# EAGLE board PCB_-_Final_Revision_v12 (EAGLE 9.7.0)
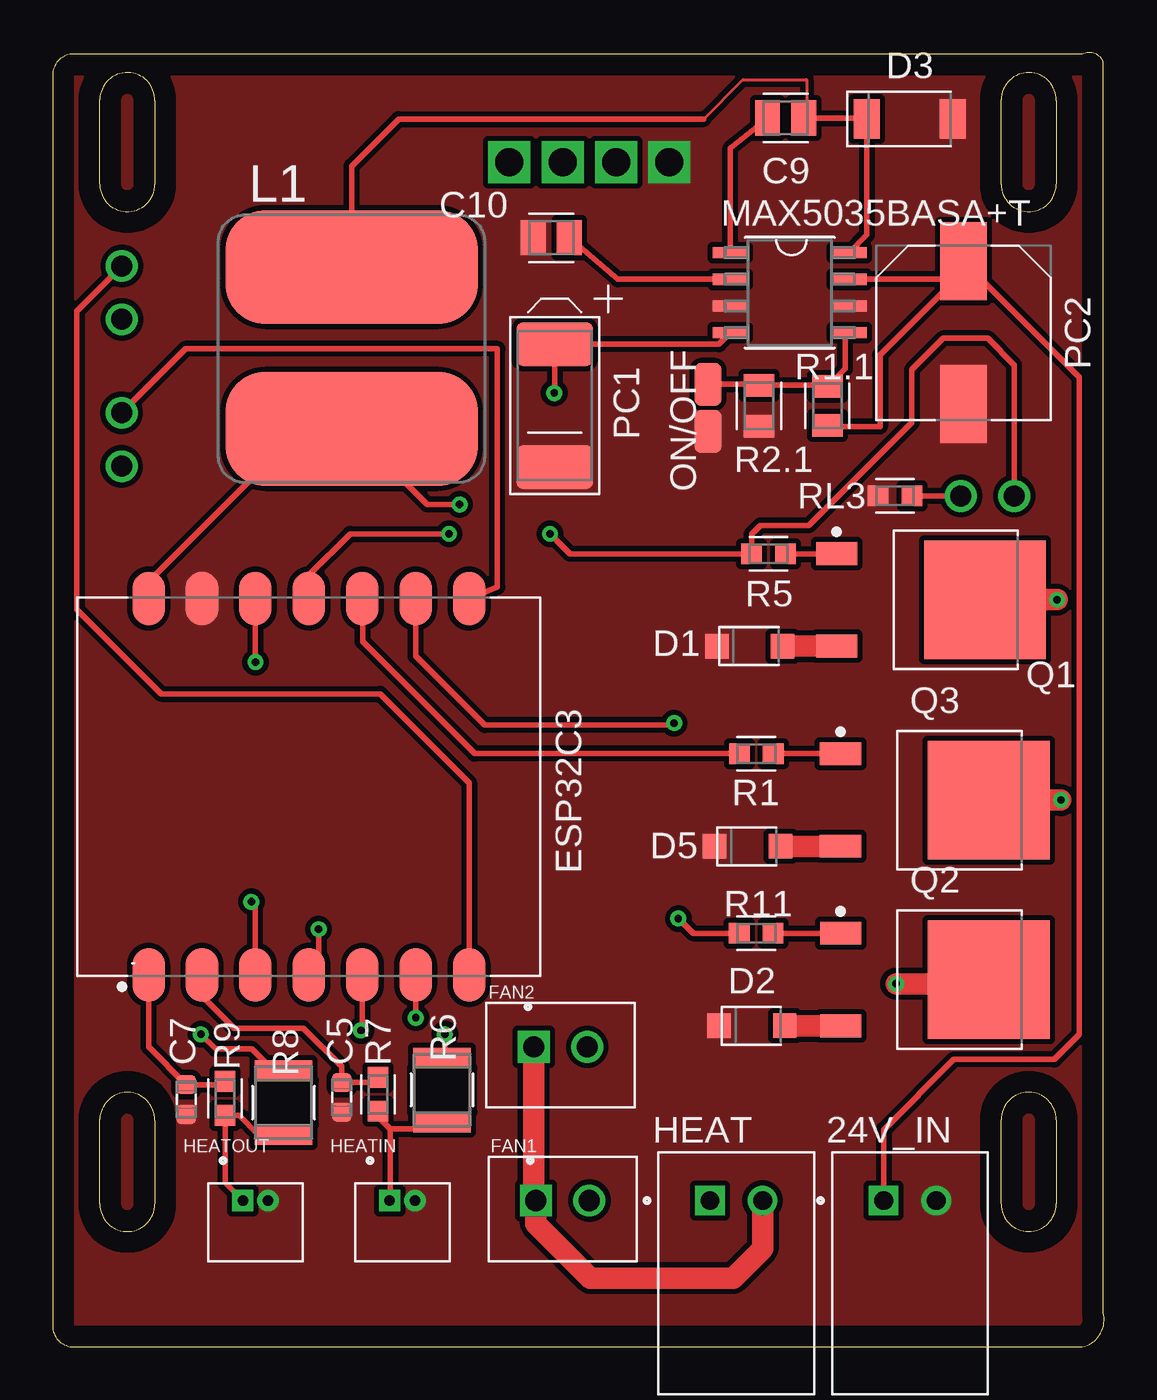
[diagram p0: board, top side]
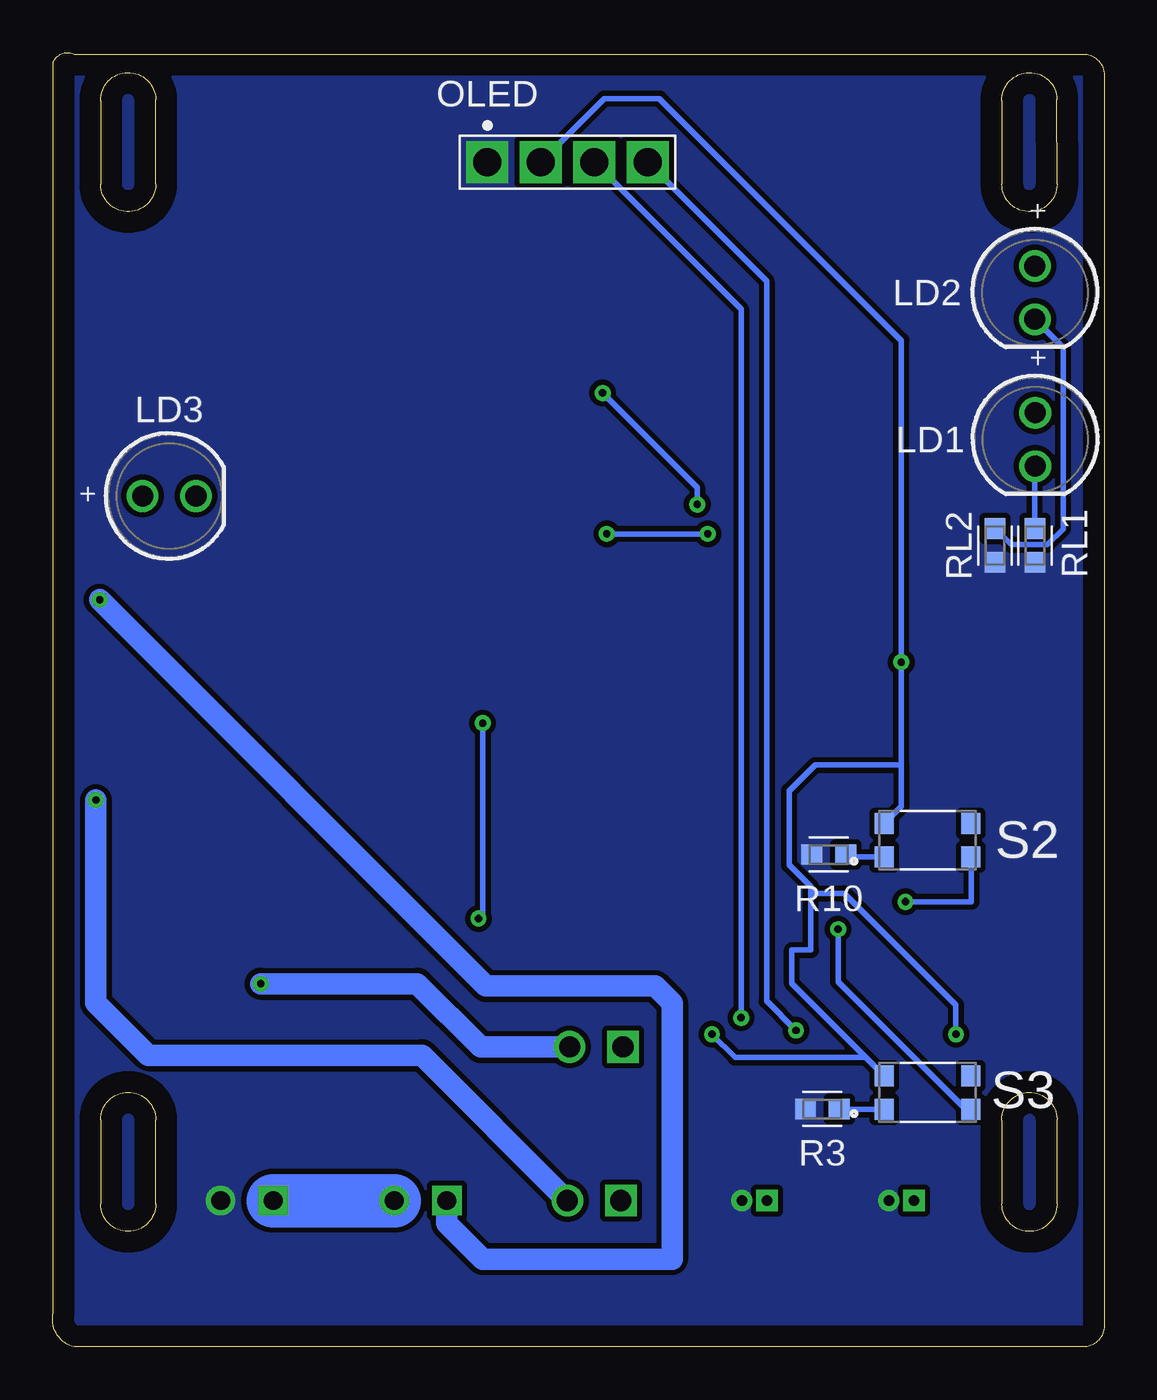
[diagram p1: board, bottom side, seen from below]

Size 50 x 61.56 mm. Coordinates in mm from the lower left corner, seen from the top.
Outline: 4.87,55.3 4.87,59.28 arc180 2.25,59.32 2.25,59.28 2.25,55.3 arc180 4.87,55.3
Outline: 4.87,55.3 4.87,55.3
Outline: 47.72,55.3 47.72,59.28 arc180 45.1,59.32 45.1,59.28 45.1,55.3 arc180 47.72,55.3
Outline: 47.72,55.3 47.72,55.3
Outline: 45.1,6.8 45.1,10.8 arc-180 47.72,10.8 47.72,6.8 arc-180 45.1,6.8
Outline: 2.25,6.8 2.25,10.78 2.25,10.81 arc-180 4.87,10.78 4.87,6.8 arc-180 2.25,6.8
Outline: 0,60.49 0,1 arc90 1,0 48.96,0 arc90 49.96,1.64 49.96,61.12 arc90 48.96,61.49 1,61.49 arc90 0,60.49
Copper layers (1*16): Top 0.035mm / dielectric 1.5mm / Bottom 0.035mm
Design rules "default": minimum track width 6mil, minimum drill 0.35mm, track to track 6mil, track to pad 6mil, pad to pad 6mil, via to via 6mil, smd to smd 6mil, copper to edge 40mil, drill to drill 6mil, minimum pad ring 10mil, minimum via ring 8mil, stop-mask expansion 4mil, vias tented up to drill 0mil, thermal gap 10mil

## Footprints (pad centres in the part's own frame; a part is rotated, then mirrored left to right if it is on the bottom)
HDR-02/RA = drill 0.9 square: 1 -1.25,0 | drill 0.9: 2 1.25,0
CAP_0603 = smd 0.92 x 0.93: 1 -0.705,0; 2 0.705,0
CAPACITOR_M = smd 1.187 x 1.677: 1 -0.865,0; 2 0.865,0
SCHOTTKY_DIODE_S = smd 1.117 x 1.167: NEG -1.56,0; POS 1.56,0
PANJIT_SB52AFC~SB56AFC_SERIES_DIODE = smd 1.236 x 1.881: NEG -2.04,0; POS 2.04,0
XIIO_ESP32C3_ALT = smd 2.54 x 1.537: 1 -8.95,7.62; 2 -8.95,5.08; 3 -8.95,2.54; 4 -8.95,0; 5 -8.95,-2.54; 6 -8.95,-5.08; 7 -8.95,-7.62; 8 8.95,-7.62; 9 8.95,-5.08; 10 8.95,-2.54; 11 8.95,0; 12 8.95,2.54; 13 8.95,5.08; 14 8.95,7.62
SMALL_CONNECT2.54 = drill 1: NEG 1.27,0 | drill 1 square: POS -1.27,0
SMALL_CONNECT = drill 0.5: NEG 0.6,0 | drill 0.5 square: POS -0.6,0
100UH_INDUCTOR = smd 5.4 x 12: P$1 0,0; P$2 7.7,0
WL-TMRC_5MM = drill 1: 1 -1.27,0; 2 1.27,0
I2C_OLED = drill 1.331 pad 1.997 square: 1 0,0; 2 2.54,0; 3 5.08,0; 4 7.62,0
SOLDER_JUMPER = smd 2.032 x 1.27: P$1 0.3,0; P$2 2.54,0
TANTALUM_CAPACITOR_68UF = smd 2.067 x 3.617: + -2.925,0; - 2.925,0
68UF_CAPAE830X1000N = smd 3.717 x 2.217: NEG 3.4,0; POS -3.4,0
NFET = smd 5.797 x 5.637: D 2.565,0 | smd 1.957 x 1.077: G -4.485,2.2; S -4.485,-2.2
RESISTOR_S = smd 0.987 x 0.97: 1 -0.806,0; 2 0.806,0
1MOHM_RESISTOR_SMD = smd 1.067 x 1.467: 1 -0.925,0; 2 0.925,0
383KOHM_RESISTOR_0805 = smd 1.067 x 1.467: 1 -0.975,0; 2 0.975,0
RES_RN73R2E_KOA-M = smd 0.914 x 2.743: 1 -1.549,0; 2 1.549,0
SW_TL6330AF200Q = smd 0.9 x 1: 1 -2.05,-0.8; 2 2.05,-0.8; 3 -2.05,0.8; 4 2.05,0.8
21-0041B_8_MXM-M = smd 1.664 x 0.533: 1 -2.826,1.905; 2 -2.826,0.635; 3 -2.826,-0.635; 4 -2.826,-1.905; 5 2.826,-1.905; 6 2.826,-0.635; 7 2.826,0.635; 8 2.826,1.905

## Placement (x,y rotation side)
24V_IN  S2B-XH-A(LF)(SN)  [HDR-02/RA]  40.76,6.96 0 top
C5  C0603C100C5GACTU  [CAP_0603]  13.74,11.87 90 top
C7  C0603C100C5GACTU  [CAP_0603]  6.36,11.77 90 top
C9  CAPACITOR_S  [CAPACITOR_M]  34.85,58.45 180 top
C10  CAPACITOR_S  [CAPACITOR_M]  23.71,52.75 0 top
D1  ES1D  [SCHOTTKY_DIODE_S]  33.14,33.33 0 top
D2  ES1D  [SCHOTTKY_DIODE_S]  33.25,15.27 0 top
D3  MBR0520LT1G  [PANJIT_SB52AFC~SB56AFC_SERIES_DIODE]  40.76,58.4 0 top
D5  ES1D  [SCHOTTKY_DIODE_S]  33.04,23.81 0 top
ESP32C3  XIAO_ESP32C3_ALT  [XIIO_ESP32C3_ALT]  12.18,26.65 90 top
FAN1  SMALL_CONNECTOR_2.54  [SMALL_CONNECT2.54]  24.25,6.96 0 top
FAN2  SMALL_CONNECTOR_2.54  [SMALL_CONNECT2.54]  24.15,14.27 0 top
HEAT  S2B-XH-A(LF)(SN)  [HDR-02/RA]  32.5,6.96 0 top
HEATIN  SMALL_CONNECT  [SMALL_CONNECT]  16.63,6.96 0 top
HEATOUT  SMALL_CONNECT  [SMALL_CONNECT]  9.64,6.96 0 top
L1  INDUCTOR_100  [100UH_INDUCTOR]  14.21,43.66 90 top
LD1  151051BS04000  [WL-TMRC_5MM]  3.28,43.16 270 bottom
LD2  151051BS04000  [WL-TMRC_5MM]  3.29,50.14 270 bottom
LD3  151051BS04000  [WL-TMRC_5MM]  44.45,40.47 0 bottom
OLED  I2C_OLED  [I2C_OLED]  29.33,56.34 0 bottom
ON/OFF  SOLDER_JUMPER  [SOLDER_JUMPER]  31.16,46.08 270 top
PC1  POLORIZED_100UF  [TANTALUM_CAPACITOR_68UF]  23.87,44.77 270 top
PC2  68UF_POLORIZED_CAP  [68UF_CAPAE830X1000N]  43.3,48.24 270 top
Q1  NFET  [NFET]  41.76,35.54 0 top
Q2  NFET  [NFET]  41.95,17.47 0 top
Q3  NFET  [NFET]  41.95,26.01 0 top
R1  RESISTOR_S  [RESISTOR_S]  33.46,28.22 180 top
R1.1  1MILLIONOHM_RESISTOR  [1MOHM_RESISTOR_SMD]  36.84,44.76 270 top
R2.1  383KOHM_RESISTOR  [383KOHM_RESISTOR_0805]  33.58,44.76 270 top
R3  RESISTOR_S  [RESISTOR_S]  13.4,11.32 180 bottom
R5  RESISTOR_S  [RESISTOR_S]  34.04,37.72 0 top
R6  RN73R2ETTD1003B25RES_RN73R2E_KOA-M  [RES_RN73R2E_KOA-M]  18.52,12.22 90 top
R7  RESISTOR_S  [RESISTOR_S]  15.48,12.02 270 top
R8  RN73R2ETTD1003B25RES_RN73R2E_KOA-M  [RES_RN73R2E_KOA-M]  10.98,11.62 270 top
R9  RESISTOR_S  [RESISTOR_S]  8.2,11.82 90 top
R10  RESISTOR_S  [RESISTOR_S]  13.1,23.42 180 bottom
R11  RESISTOR_S  [RESISTOR_S]  33.45,19.67 180 top
RL1  RESISTOR_S  [RESISTOR_S]  3.3,38.12 270 bottom
RL2  RESISTOR_S  [RESISTOR_S]  5.2,38.12 270 bottom
RL3  RESISTOR_S  [RESISTOR_S]  40.05,40.47 180 top
S2  TL6330AF200Q  [SW_TL6330AF200Q]  8.4,24.1 0 bottom
S3  TL6330AF200Q  [SW_TL6330AF200Q]  8.4,12.1 0 bottom
U1  MAX5035BASA+T  [21-0041B_8_MXM-M]  35.04,50.14 0 top

## Library data of the parts
24V_IN HEAT = Connectors; CREATED_BY: PCBLayout.com; DIGIKEY_PART_NUMBER: 455-2257-ND; MANUFACTURER: JST Sales America Inc.; MPN: S2B-XH-A(LF)(SN)
C5 C7 = Resistor_Capacitor; CREATED_BY: PCBLayout.com; DIGIKEY_PART_NUMBER: 399-7814-2-ND; MANUFACTURER: KEMET; MPN: C0603C100C5GACTU; PACKAGE: SMD 0603
C9 C10 D1-D3 D5 FAN1 FAN2 HEATIN HEATOUT L1 ON/OFF PC1 PC2 Q1-Q3 R1 R1.1 R2.1 R3 R5 R7 R9-R11 RL1-RL3 = At home - Capacitors/resistors/diodes/mosfets
ESP32C3 = Microcontrollers
LD1-LD3 = Wurth_LEDs_WL-TMRC; CHIP-TECHNOLOGY: GaN; DATASHEET-URL: https://www.we-online.com/redexpert/spec/151051BS04000?ae; DOMINANT-WAVELENGTH: 470nm; EMITTING-COLOR: Blue; FORWARD-VOLTAGE: 3.2V; LUMINOUS-INTENSITY: 500mcd; MOUNT: THT; PART-NUMBER: 151051BS04000; PEAK-WAVELENGTH: 465nm; VIEWING-ANGLE: 40°
OLED = I2C_OLED
R6 R8 = 100K resistor 1%; COPYRIGHT: Copyright (C) 2022 Ultra Librarian. All rights reserved.; DIGI-KEY_PART_NUMBER_1: 2019-RN73R2ETTD1003B25TR-ND; DIGI-KEY_PART_NUMBER_2: 2019-RN73R2ETTD1003B25CT-ND; DIGI-KEY_PART_NUMBER_3: 2019-RN73R2ETTD1003B25DKR-ND; MANUFACTURER_PART_NUMBER: RN73R2ETTD1003B25; MFR_NAME: KOA Speer
S2 S3 = Tactile Switch; MANUFACTURER: E-Switch; MAXIMUM_PACKAGE_HEIGHT: 1.9 mm; PARTREV: D; SNAPEDA_PN: TL6330AF200Q; STANDARD: Manufacturer Recommendations
U1 = Buck Converters

## Nets
3V3: ESP32C3.12 OLED.2 R6.2 R8.1 S2.3 S3.3
24V [24V]: 24V_IN.1 FAN1.POS FAN2.POS HEAT.2 PC2.POS R1.1.2 U1.7
+5V: ESP32C3.14 L1.P$1 PC1.+ U1.4
A0: C7.2 ESP32C3.1 R9.2
A1: C5.2 ESP32C3.2 R7.1
BST: C9.2 U1.1
BUTTON1: R10.1 S2.1
BUTTON2: R3.1 S3.1
D4: ESP32C3.5 OLED.4
D5: ESP32C3.6 OLED.3
D6: ESP32C3.7 LD2.1
D7: ESP32C3.8 LD1.1
D8: ESP32C3.9 R11.2
D9: ESP32C3.10 R1.2
D10: ESP32C3.11 LD3.1 R5.1
DRAIN1 [24V]: HEAT.1 Q1.D
DRAIN2 [24V]: FAN1.NEG Q3.D
DRAIN3 [24V]: FAN2.NEG Q2.D
EGND [Ground]: 24V_IN.2 C5.1 C7.1 C10.1 D1.NEG D2.NEG D3.POS D5.NEG ESP32C3.13 HEATIN.NEG HEATOUT.NEG OLED.1 ON/OFF.P$2 PC1.- PC2.NEG R2.1.2 R3.2 R10.2 RL1.2 RL2.2 RL3.2 U1.3 U1.6
ESP32C3_A2: ESP32C3.3 S2.2
ESP32C3_A3: ESP32C3.4 S3.2
GATE1: Q1.G R5.2
GATE2: Q3.G R1.1
GATE3: Q2.G R11.1
HEAT_IN: HEATIN.POS R6.1 R7.2
HEAT_OUT: HEATOUT.POS R8.2 R9.1
LX: C9.1 D3.NEG L1.P$2 U1.8
ON/OFF: ON/OFF.P$1 R1.1.1 R2.1.1 U1.5
RL1: LD1.2 RL1.1
RL2: LD2.2 RL2.1
RL3: LD3.2 RL3.1
SOURCE1 [24V]: D1.POS Q1.S
SOURCE2 [24V]: D5.POS Q3.S
SOURCE3 [24V]: D2.POS Q2.S
VD: C10.2 U1.2

## Tracks (layer width: path | path; a pad name or v marks a point on that pad's centre or on a via)
3V3  (via drill 0.35)
  Top 0.254: ESP32C3.12 v9.64,32.58 v9.65,32.57 | v18.65,14.87 18.65,13.9 R6.2 | v7.05,14.87 7.75,14.17 9.48,14.17 10.48,13.17 R8.1
  Bottom 0.254: 9.65,27.67 v9.65,32.57 9.65,47.87 21.15,59.37 23.76,59.37 OLED.2 | 9.65,27.67 9.65,25.7 S2.3 | 9.65,27.67 13.75,27.67 14.98,26.44 14.98,22.92 13.95,21.89 13.95,21.57 | v18.65,14.87 17.55,13.77 11.32,13.77 S3.3 14.85,17.3 14.85,18.87 13.95,18.87 13.95,21.57 | 13.95,21.57 12.35,21.57 7.05,16.27 v7.05,14.87
24V
  Top 0.254: U1.7 42.44,50.78 PC2.POS | 24V_IN.1 39.51,10.33 42.85,13.67 47.63,13.67 48.82,14.86 48.82,46.12 PC2.POS | PC2.POS 43.3,51.14 39.35,47.19 39.35,43.77 36.9,43.77 R1.1.2
  Top 1.016: HEAT.2 33.75,4.68 32.35,3.27 25.57,3.27 22.98,5.86 FAN1.POS 22.88,7.06 FAN2.POS
  Bottom 2.54: HEAT.2 24V_IN.1
+5V  (via drill 0.35)
  Top 0.254: ESP32C3.14 4.56,36.4 11.83,43.66 L1.P$1 17.8,40.07 v19.35,40.07 | U1.4 31.67,47.69 PC1.+ 23.87,45.4 v23.85,45.37
  Bottom 0.254: v23.85,45.37 19.35,40.87 v19.35,40.07
A0
  Top 0.254: R9.2 8.05,12.47 C7.2 4.56,14.27 ESP32C3.1
A1
  Top 0.254: R7.1 15.23,12.58 C5.2 13.74,13.33 11.92,15.16 8.64,15.16 7.1,16.7 ESP32C3.2
BST
  Top 0.254: C9.2 32.22,57 U1.1
BUTTON1
  Bottom 0.254: R10.1 12.17,23.3 S2.1
BUTTON2
  Bottom 0.254: R3.1 12.57,11.3 S3.1
D4  (via drill 0.35)
  Top 0.254: ESP32C3.5 14.72,15.12 v14.66,15.06
  Bottom 0.254: OLED.4 16.06,50.69 16.06,16.46 v14.66,15.06
D5  (via drill 0.35)
  Top 0.254: ESP32C3.6 v17.26,15.66
  Bottom 0.254: v17.26,15.66 17.26,49.36 OLED.3
D6
  Top 0.254: LD2.1 1.15,49.27 1.15,35.07 5.17,31.05 15.57,31.05 19.8,26.82 ESP32C3.7
D7
  Top 0.254: LD1.1 6.33,47.47 21.15,47.47 21.15,36.14 ESP32C3.8
D8  (via drill 0.35)
  Top 0.254: ESP32C3.9 17.26,32.86 20.55,29.57 29.45,29.57 v29.55,29.67 | v29.75,20.37 30.45,19.67 R11.2
  Bottom 0.254: v29.55,29.67 29.55,20.57 v29.75,20.37
D9
  Top 0.254: ESP32C3.10 14.74,34.78 14.74,33.54 20.07,28.22 R1.2
D10  (via drill 0.35)
  Top 0.254: LD3.1 45.72,46.7 44.45,47.97 42.35,47.97 40.85,46.47 40.85,43.97 35.95,39.07 33.65,39.07 33.23,38.65 R5.1 24.6,37.72 v23.65,38.67 | ESP32C3.11 12.18,36.71 14.15,38.67 v18.85,38.67
  Bottom 0.254: v18.85,38.67 v23.65,38.67
DRAIN1  (via drill 0.35)
  Top 1.016: Q1.D v47.76,35.54
  Bottom 1.016: v47.76,35.54 29.39,17.17 21.35,17.17 20.55,16.37 20.55,4.17 29.55,4.17 31.25,5.88 HEAT.1
DRAIN2  (via drill 0.35)
  Top 1.016: v47.94,26.01 Q3.D
  Bottom 1.016: v47.94,26.01 47.94,16.36 45.45,13.87 32.43,13.87 FAN1.NEG
DRAIN3  (via drill 0.35)
  Top 1.016: Q2.D 44.31,17.27 v40.1,17.27
  Bottom 1.016: v40.1,17.27 32.65,17.27 29.65,14.27 FAN2.NEG
EGND
  pour Top (isolate 0.254, no thermals): 1.05,0.15 48.44,0.15 48.7,0.17 48.94,0.23 49.16,0.34 49.36,0.48 49.54,0.66 49.68,0.86 49.79,1.08 49.85,1.32 49.87,1.57 49.87,60.47 49.86,60.63 49.82,60.79 49.75,60.93 49.66,61.06 49.54,61.18 49.41,61.27 49.26,61.34 49.11,61.38 48.94,61.39 0.95,61.39 0.79,61.38 0.63,61.33 0.49,61.25 0.37,61.15 0.26,61.03 0.19,60.89 0.14,60.73 0.12,60.57 0.12,1.07 0.14,0.91 0.18,0.75 0.25,0.61 0.34,0.48 0.45,0.36 0.59,0.27 0.73,0.2 0.89,0.16
  pour Bottom (isolate 0.254, no thermals): 0.85,0.13 48.45,0.13 48.7,0.16 48.94,0.22 49.17,0.33 49.37,0.47 49.55,0.65 49.69,0.85 49.8,1.08 49.86,1.32 49.88,1.57 49.88,60.47 49.87,60.63 49.83,60.79 49.76,60.94 49.67,61.07 49.55,61.19 49.42,61.28 49.27,61.35 49.11,61.39 48.95,61.41 0.85,61.41 0.7,61.39 0.57,61.35 0.44,61.28 0.33,61.19 0.24,61.08 0.17,60.95 0.13,60.81 0.11,60.67 0.11,0.87 0.13,0.73 0.17,0.59 0.24,0.46 0.33,0.35 0.44,0.26 0.57,0.19 0.7,0.15
ESP32C3_A2  (via drill 0.35)
  Top 0.254: ESP32C3.3 9.64,20.98 v9.45,21.17
  Bottom 0.254: v9.45,21.17 6.32,21.17 6.32,23.29 S2.2
ESP32C3_A3  (via drill 0.35)
  Top 0.254: v12.65,19.87 12.65,18.16 ESP32C3.4
  Bottom 0.254: S3.2 6.58,11.3 12.65,17.37 v12.65,19.87
GATE1
  Top 0.254: Q1.G 37.26,37.72 R5.2
GATE2
  Top 0.254: R1.1 Q3.G
GATE3
  Top 0.254: R11.1 Q2.G
HEAT_IN
  Top 0.254: R7.2 15.48,10.94 16.05,10.37 | 16.05,10.37 17.15,10.37 17.25,10.47 18.32,10.47 R6.1 | 16.05,10.37 16.05,6.98 HEATIN.POS
HEAT_OUT
  Top 0.254: HEATOUT.POS 8.2,7.81 R9.1 8.86,11.01 9.81,10.07 R8.2
LX
  Top 0.152: 30.95,58.4 32.82,60.27 35.85,60.27 35.85,58.58 C9.1
  Top 0.254: U1.8 38.72,52.89 38.72,58.27 | 38.72,58.27 D3.NEG | C9.1 38.54,58.45 38.72,58.27 | L1.P$2 14.21,56.16 16.45,58.4 30.95,58.4
ON/OFF
  Top 0.254: U1.5 37.68,48.04 37.68,46.52 R1.1.1 36.89,45.74 R2.1.1 33.54,45.78 ON/OFF.P$1
RL1
  Bottom 0.254: LD1.2 RL1.1
RL2
  Bottom 0.254: LD2.2 1.95,47.53 1.95,38.9 2.7,38.15 4.43,38.15 RL2.1
RL3
  Top 0.254: LD3.2 RL3.1
SOURCE1
  Top 0.152: D1.POS
  Top 1.016: D1.POS Q1.S
SOURCE2
  Top 1.016: Q3.S D5.POS
SOURCE3
  Top 1.016: D2.POS Q2.S
VD
  Top 0.254: C10.2 26.87,50.78 U1.2